# Altium PCB PCB1.PcbDoc
Units mil, origin at the board's own origin, x right, y up, seen from the top; angles counter-clockwise.
Board outline 3140 x 1400 mil, 2 copper layers (Top Layer, Bottom Layer); 21 components, 17 nets, 74 pads, 14 vias.
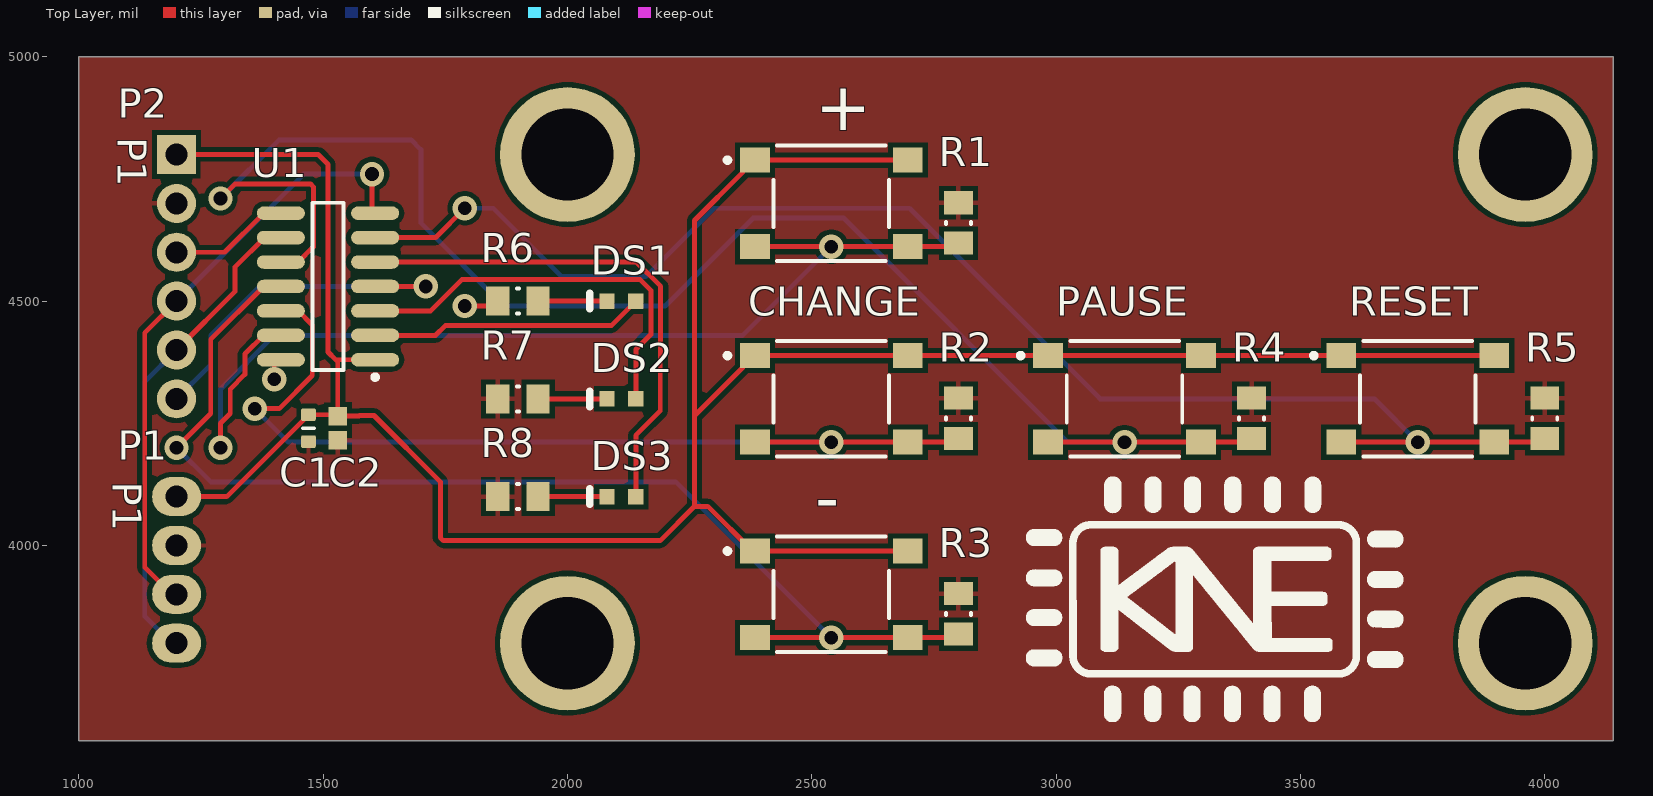
[diagram p0: Top Layer view]
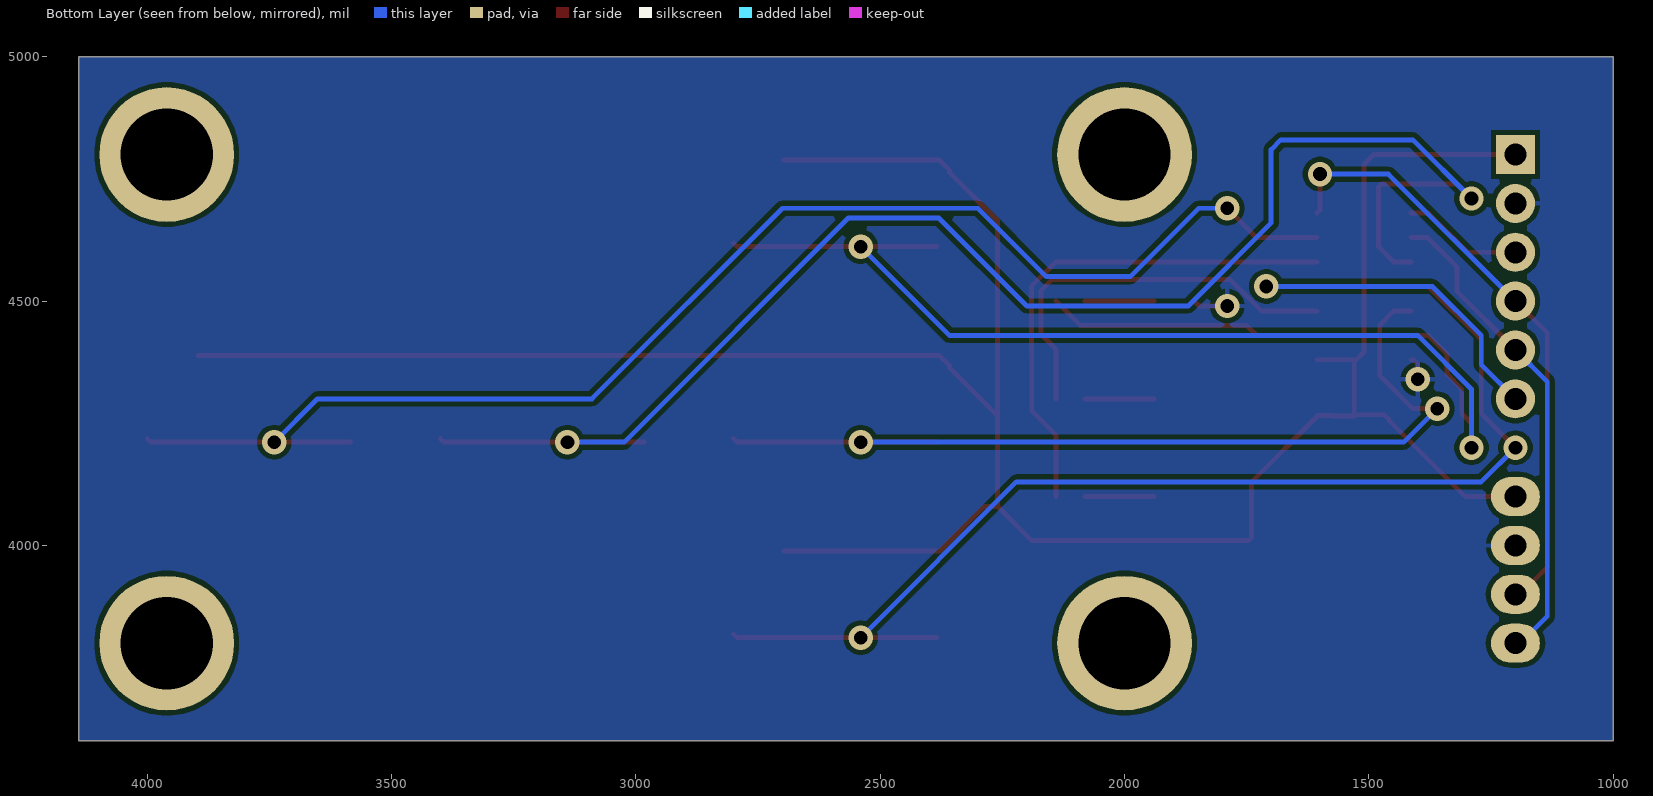
[diagram p1: Bottom Layer view, seen from below]
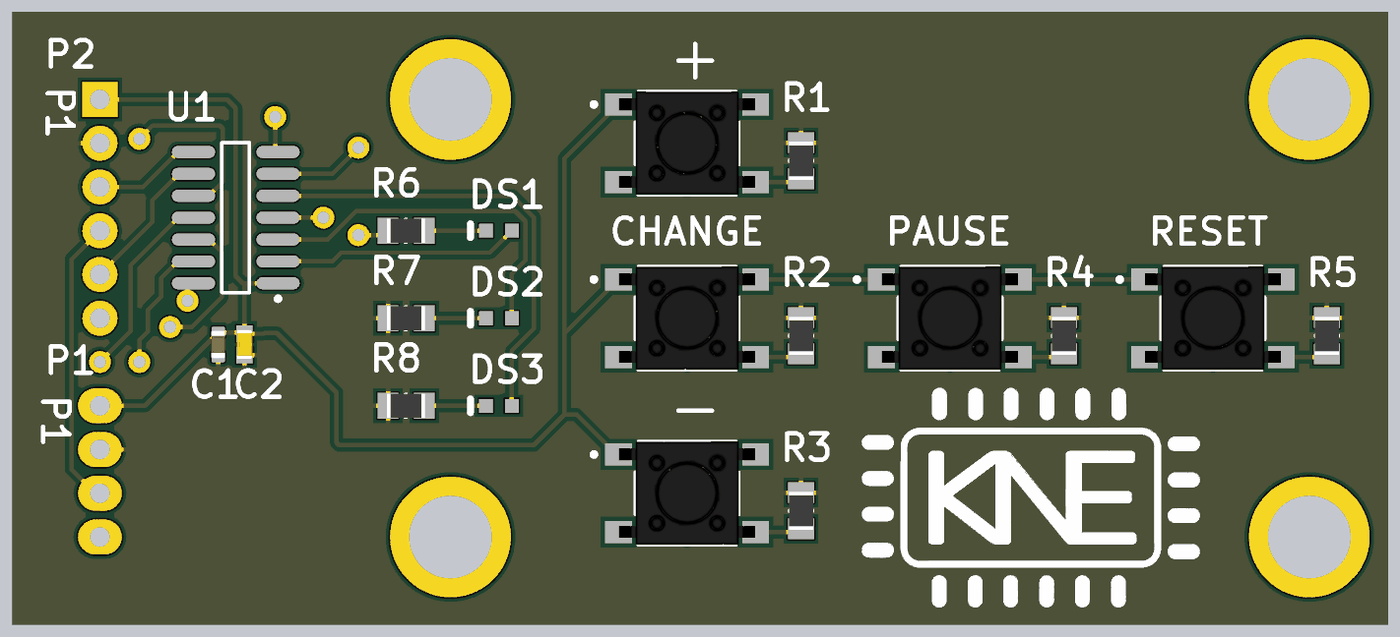
[diagram p2: 3D render of the assembled board from above, using the file's embedded part models]

## Layer stack, top to bottom
Top Solder: solder mask 0.4, Solder Resist, Dk 3.5
Top Layer: signal copper 1.4
Dielectric 1: dielectric 12.6, FR-4, Dk 4.8
Bottom Layer: signal copper 1.4
Bottom Solder: solder mask 0.4, Solder Resist, Dk 3.5

## Board outline
1000,3600 4140,3600 4140,5000 1000,5000

## Design rules (kind name [scope] priority, off if disabled: settings)
Clearance [All] p1: gap=10 ignorepadtopadclearanceinfootprint=FALSE
PolygonConnect [All] p1: connectstyle=Relief reliefconductorwidth=10 reliefentries=4 polygonreliefangle="90 Angle" airgapwidth=10
RoutingVias [All] p1: holewidth=28 width=50 viastyle="Through Hole" minholewidth=28 minwidth=50 maxholewidth=28 maxwidth=50
SolderMaskExpansion [All] p1: expansion=4 istentingtop=FALSE
SupplyNets "Schematic Supply Nets_1" [InNet('GND')] p1: voltage=0.000
SupplyNets "Schematic Supply Nets" [InNet('VCC')] p2: voltage=0.000
Width [All] p1: maxlimit=10 minlimit=10 preferedwidth=10
30 further rules are at their usual default settings.

## Components (designator, comment, footprint, x,y, rotation, side; value= is the part's Value field where it differs from the comment)
+ "PTS645SM43SMTR92LFS" FP-PTS645SM43SMTR92LFS-MFG 2540,4700 r0 top (schematic designator SW1)
- "PTS645SM43SMTR92LFS" FP-PTS645SM43SMTR92LFS-MFG 2540,3900 r0 top (schematic designator SW3)
C1 "Capacitor 10µF +/-20% 10V 0603" CAPC0603(1608)100_L 1470,4240 r270 top value=10µF
C2 "Capacitor 100 nF +/-10% 50 V 0603" CAPC1608X90X40NL10T20 1530,4240 r270 top value=100nF
CHANGE "PTS645SM43SMTR92LFS" FP-PTS645SM43SMTR92LFS-MFG 2540,4300 r0 top (schematic designator SW2)
DS1 "HSMH-C190" AVAG-HSMX-C190_V 2110.48,4500 r180 top
DS2 "HSMH-C190" AVAG-HSMX-C190_V 2110.48,4300 r180 top
DS3 "HSMH-C190" AVAG-HSMX-C190_V 2110.48,4100 r180 top
P1 "Goldpin 1x4/To main controller" "Goldpin 1x4-Footprint-1" 1200,4100 r270 top
P2 "Goldpin 1x6/UART for programming" "Goldpin 1x6-Footprint-1" 1200,4800 r270 top
PAUSE "PTS645SM43SMTR92LFS" FP-PTS645SM43SMTR92LFS-MFG 3140,4300 r0 top (schematic designator SW4)
R1 "Resistor 10k +/-1% 0805 125 mW" RESC2013X50X35ML15T15 2800,4660 r90 top value=10k
R2 "Resistor 10k +/-1% 0805 125 mW" RESC2013X50X35ML15T15 2800,4260 r90 top value=10k
R3 "Resistor 10k +/-1% 0805 125 mW" RESC2013X50X35ML15T15 2800,3860 r90 top value=10k
R4 "Resistor 10k +/-1% 0805 125 mW" RESC2013X50X35ML15T15 3400,4260 r90 top value=10k
R5 "Resistor 10k +/-1% 0805 125 mW" RESC2013X50X35ML15T15 4000,4260 r90 top value=10k
R6 "Resistor 10k +/-1% 0805 125 mW" RESC2013X50X35ML15T15 1898.66,4500 r180 top value=150
R7 "Resistor 10k +/-1% 0805 125 mW" RESC2013X50X35ML15T15 1898.66,4300 r180 top value=150
R8 "Resistor 10k +/-1% 0805 125 mW" RESC2013X50X35ML15T15 1898.66,4100 r180 top value=150
RESET "PTS645SM43SMTR92LFS" FP-PTS645SM43SMTR92LFS-MFG 3740,4300 r0 top (schematic designator SW5)
U1 "ATtiny84A-SSU" 14S1_M 1510,4530 r180 top

## Footprints (in the part's own frame and the unit in brackets; to place one, negate y for a bottom-side part, rotate by r counter-clockwise, add the part's x,y. Pads: shape width x height; smd on the part's side, far side on the other; paste and mask are expansions set on the pad)
14S1_M [mm] "SOIC, 14-Leads, Body 8.7x3.9mm, Pitch 1.27mm, IPC Low Density"
  oval 2.5x0.7 smd: 1(-2.45,3.81) 2(-2.45,2.54) 3(-2.45,1.27) 4(-2.45,0) 5(-2.45,-1.27) 6(-2.45,-2.54) 7(-2.45,-3.81) 8(2.45,-3.81) 9(2.45,-2.54) 10(2.45,-1.27) 11(2.45,0) 12(2.45,1.27) 13(2.45,2.54) 14(2.45,3.81)
  silkscreen extent -2.58,-4.35 0.8,4.83, body extent -1.99,-4.37 1.99,4.37, height 1.75
AVAG-HSMX-C190_V [mm] "SMD, 2-Leads, Body 1.6x0.8mm, Height 0.9mm"
  rect 0.8x0.8 smd: 1(-0.75,0) 2(0.75,0)
  silkscreen extent 1.65,-0.4 1.65,0.4, body extent -0.8,-0.4 0.8,0.4, height 0.9
CAPC0603(1608)100_L [mm] "Chip Capacitor, Body 1.6x0.8mm, Height 1.0mm, IPC High Density"
  rrect25% 0.66x0.76 smd: 1(-0.7,0) 2(0.7,0)
  silkscreen extent 0,-0.3 0,0.3, body extent -0.8,-0.4 0.8,0.4, height 0.95
CAPC1608X90X40NL10T20 [mm] "Chip Capacitor, 2-Leads, Body 1.70x0.90mm, IPC Medium Density"
  rect 0.95x0.95 smd: 1(-0.625,0) 2(0.625,0)
  body extent -0.85,-0.45 0.85,0.45, height 0.9
FP-PTS645SM43SMTR92LFS-MFG [mm]
  rect 1.55x1.3 smd paste+0 mask+0: 1(-3.975,2.25) 2(3.975,2.25) 3(-3.975,-2.25) 4(3.975,-2.25)
  silkscreen extent -5.52,-3 3,3, body extent -4.85,-3.1 4.85,3.1, height 0.25
"Goldpin 1x4-Footprint-1" [mil]
  oval 80x100 hole 45: 1(0,0) 2(100,0) 3(200,0) 4(300,0)
"Goldpin 1x6-Footprint-1" [mil]
  rect 80x80 hole 45: 1(0,0)
  round 80 hole 45: 2(100,0) 3(200,0) 4(300,0) 5(400,0) 6(500,0)
RESC2013X50X35ML15T15 [mm] "Chip Resistor, 2-Leads, Body 2.2x1.4mm, IPC Low Density"
  rect 1.2x1.5 smd: 1(-1.05,0) 2(1.05,0)
  silkscreen extent -0.05,-0.65 0.05,0.65, body extent -1.1,-0.7 1.1,0.7, height 0.5

## Part data
+ - CHANGE PAUSE RESET: library part CMP-2000-05160-2, "SWITCH TACTILE SPST-NO 0.05A 12V", Case/Package=SMD/SMT, Color=Black, Contact Resistance=100mR, Current Rating=50mA, Max Operating Temperature=60°C, Max Voltage Rating (DC)=12V, Min Operating Temperature=-20°C, Operating Force=160gf, Package Quantity=1, Actuator Length=0.85mm, Actuator Material=Nylon, Actuator Type=Standard, Contact Material=Silver, Contact Plating=Silver, Depth=9mm, Illumination Type=Non-Illuminated, Lead Free="Lead Free", Length=6mm, Max Current Rating=50mA, Mechanical Life=100000Cycles, Mount="Surface Mount", Orientation=Straight, Packaging="Tape and Reel", REACH SVHC="No SVHC", Switch Function=Off-Mom, Termination="Gull Wing", Throw Configuration=SPST, Voltage Rating (DC)=12V
C1: library part CMP-001-00075-4, "Chip Capacitor, 10µF +/-20%, 10V, 0603, Thickness 1 mm", Case/Package=0603, Max Operating Temperature=85°C, Min Operating Temperature=-55°C, Tolerance=10%, Voltage Rating=10V, Mounting Technology=SMT, Pins=2
C2: library part CMP-001-00017-6, "Chip Capacitor, 100 nF, +/- 10%, 50 V, 0603 (1608 Metric)", Capacitor Type=Ceramic, Case/Package=0603, Max Operating Temperature=125°C, Min Operating Temperature=-55°C, Tolerance=10%, Voltage Rating=50V, Mounting Technology=SM, Pins=2, RoHS Compliant=True
DS1 DS2 DS3: library part CMP-007-00014-2, "LED Uni-Color Red, 65 mW, 20 mA, -40 to 85 degC, 2-Pin SMD, RoHS, Tape and Reel", Case/Package=0603, Colour=Red, Forward Current=20mA, Forward Voltage=1.8V, Manufacturer=Avago, Max Operating Temperature=85°C, Min Operating Temperature=-40°C, Package Description="2-Pin Surface Mount Device, Body 1.6 x 0.8 mm, Height 0.9 mm", Package Quantity=4000, Package Reference=HSMX-C190, Power=78mW, Datasheet URL=http://docs.avagotech.com/docs/AV02-0551EN, Datasheet Version=Mar-12, Illumination Colour=Red, Lens Style=Diffused, Luminous Intensity=17mcd, Manufacturer URL=http://www.avagotech.com/, Mounting Technology=SM, Nominal Vf=1.8V, Packaging=TapeandReel, Pins=2, RoHS Compliant=True, Viewing Angle=170degrees
P1: library part CMP-002-00078-2, "Goldpin, connector, 1 row 4 pin"
P2: library part CMP-002-00081-1, "Goldpin, connector, 1 row 6 pin"
R1 R2 R3 R4 R5 R6 R7 R8: library part CMP-009-00018-5, "Chip Resistor, 10 KOhm, +/- 1%, 125 mW, -55 to 155 degC, 0805 (2012 Metric)", Case/Package=0805, Max Operating Temperature=155°C, Min Operating Temperature=-55°C, Power=125mW, Tolerance=1%, Voltage Rating=150V, Mounting Technology=SM, Pins=2, RoHS Compliant=True
U1: library part CMP-0093-00274-1, "8-bit AVR Microcontroller,  20MHz, 1.8-5.5V, 8KB Flash, 512 Bytes EEPROM, 512 Bytes SRAM, 14-pin SOIC, Industrial Grade (-40°C to 85°C), Pb-Free", Code_IPC=SOIC127P600-14, Code_JEDEC=MS-012-AB, ComponentLink1Description="Manufacturer URL", ComponentLink1URL=http://www.atmel.com/, ComponentLink2Description="ATtiny24A/44A/84A Datasheet", ComponentLink2URL=http://www.atmel.com/dyn/resources/prod_documents/doc8183.pdf, ComponentLink3Description="ATtiny24A/44A/84A Summary", ComponentLink3URL=http://www.atmel.com/dyn/resources/prod_documents/8183S.pdf, DatasheetVersion="revD, Apr-2011", PackageDescription="14-Lead, 0.150â€ Wide Body, Plastic Gull Wing Small Outline Package (SOIC)", PackageReference=14S1, PackageVersion="revA, Feb-2002"

## Free pads (board coordinates)
  round 275.59 hole 188.98: M1(2000,4800) M2(3960,4800) M3(2000,3800) M4(3960,3800)

## Via types
v1: diameter 50, hole 28, Top Layer to Bottom Layer, 14 vias

## Nets (pads, with @x,y where several pads share a name; then routed paths per layer and width w, separated by ;. In a path a pad name is that pad's centre, name@x,y a point inside that pad or via, vN(x,y) a via of type N, cw(c..) or ccw(c..) an arc to the next point about the centre after c; other vN are vias at no path point)
GND: C1.2 C2.2 P1.2 P2.2 R1.2 R2.2 R3.2 R4.2 R5.2 R6.2 R7.2 R8.2 U1.14 | length 120.3
  Top Layer w10: v1(1400,4340) 1400,4371.89 1408.11,4380 U1.14 ; v1(1790,4490) 1847.32,4490 R6.2
MISO: P2.3 U1.8 | length 246.7
  Top Layer w10: P2.3 1298.11,4600 1378.11,4680 U1.8
NetDS1_2: DS1.2 R6.1 | length 140.9
  Top Layer w10: R6.1 DS1.2
NetDS2_2: DS2.2 R7.1 | length 140.9
  Top Layer w10: R7.1 DS2.2
NetDS3_2: DS3.2 R8.1 | length 140.9
  Top Layer w10: R8.1 DS3.2
PA0: +.3 +.4 R1.1 U1.13 | length 2212.1
  Top Layer w10: v1(1290,4200) 1290,4250 1310,4270 1310,4320 1340,4350 1340,4391.89 1378.11,4430 U1.13 ; +.3 v1(2540,4611.42) +.4 2792.76,4611.42 R1.1
  Bottom Layer w10: v1(1290,4200) 1290,4320 1400,4430 2358.58,4430 v1(2540,4611.42)
PA1: CHANGE.3 CHANGE.4 R2.1 U1.12 | length 1953.3
  Top Layer w10: v1(1360,4280) 1410,4280 1477.76,4347.76 1477.76,4451.22 1448.98,4480 U1.12 ; CHANGE.3 v1(2540,4211.42) CHANGE.4 2792.76,4211.42 R2.1
  Bottom Layer w10: v1(1360,4280) 1428.58,4211.42 v1(2540,4211.42)
PA2: -.3 -.4 R3.1 U1.11 | length 2359.7
  Top Layer w10: v1(1200,4200) 1270,4270 1270,4421.89 1378.11,4530 U1.11 ; -.3 v1(2540,3811.42) -.4 2792.76,3811.42 R3.1
  Bottom Layer w10: v1(1200,4200) 1270,4130 2221.42,4130 v1(2540,3811.42)
PA3: PAUSE.3 PAUSE.4 R4.1 U1.10 | length 3219.7
  Top Layer w10: v1(1290,4710) 1320,4740 1474.14,4740 1480,4734.14 1480,4611.02 1448.98,4580 U1.10 ; PAUSE.3 v1(3140,4211.42) PAUSE.4 3392.76,4211.42 R4.1
  Bottom Layer w10: v1(1290,4710) 1410,4830 1680,4830 1700,4810 1700,4660 1870,4490 2200,4490 2380,4670 2565.3,4670 3023.88,4211.42 v1(3140,4211.42)
PA4: R5.1 RESET.3 RESET.4 U1.6 | length 2892.1
  Top Layer w10: U1.6 1730,4630 v1(1790,4690) ; RESET.3 v1(3740,4211.42) RESET.4 3992.76,4211.42 R5.1
  Bottom Layer w10: v1(1790,4690) 1848.28,4690 1988.28,4550 2160,4550 2300,4690 2700,4690 3090,4300 3651.42,4300 v1(3740,4211.42)
PB0: DS1.1 U1.2 | length 562.5
  Top Layer w10: U1.2 1730,4430 1750,4450 2090,4450 DS1.1
PB1: DS2.1 U1.3 | length 835.1
  Top Layer w10: U1.3 1720,4480 1784.53,4544.53 2148.18,4544.53 2170.75,4521.96 2170.75,4431.73 2140,4400.98 DS2.1
PB2: DS3.1 U1.5 | length 1056.2
  Top Layer w10: U1.5 2140.99,4580 2190.75,4530.25 2190.75,4390.75 2190,4390 2190,4275.37 2140,4225.37 DS3.1
RESET: P2.6 U1.4 | length 783.1
  Top Layer w10: P2.6 P2.6@1210,4300 ; U1.4 v1(1710,4530)
  Bottom Layer w10: P2.6@1205.15,4326.97 1202.93,4324.75 1200,4321.82 P2.6 1270,4370 1270,4430 1370,4530 v1(1710,4530)
SCL/CLK: P1.4 P2.5 U1.9 | length 997.8
  Top Layer w10: P2.5 1320,4520 1320,4570 1380,4630 U1.9
  Bottom Layer w10: P1.4 1190,3800 1135,3855 1135,4335 P2.5
SDA/MOSI: P1.3 P2.4 U1.7 | length 1250.1
  Top Layer w10: P1.3 1190,3900 1135,3955 1135,4435 P2.4 ; v1(1600,4760) 1600,4686.46 U1.7
  Bottom Layer w10: P2.4 1460,4760 v1(1600,4760)
VCC: +.1 +.2 -.1 -.2 C1.1 C2.1 CHANGE.1 CHANGE.2 P1.1 P2.1 PAUSE.1 PAUSE.2 RESET.1 RESET.2 U1.1 | length 5497.2
  Top Layer w10: P1.1 1302.44,4100 1460.04,4257.6 1460.04,4259.56 1468.04,4267.56 C1.1 1527.05,4267.56 C2.1 ; P2.1 1490,4800 1510,4780 1510,4395.86 1525.86,4380 ; U1.1 1525.86,4380 ; -.2 -.1 2378.58,3988.58 2287.17,4080 2260,4080 ; +.2 +.1 2378.58,4788.58 2357.99,4767.99 2357.99,4763.07 2260,4665.08 2260,4265.08 ; RESET.2 RESET.1 PAUSE.2 PAUSE.1 CHANGE.2 CHANGE.1 2378.58,4388.58 2357.99,4367.99 2357.99,4363.07 2260,4265.08 ; 1525.86,4380 1530,4375.86 C2.1 ; C2.1 1573.3,4264.61 1574.55,4265.86 1604.14,4265.86 1740,4130 1740,4015.86 1745.86,4010 2190,4010 2260,4080 ; 2260,4080 2260,4265.08

## Polygon pours and split planes (outlines as drawn)
GND on Top Layer "GROUND POUR" (solid, pour order 0): 1000,5000 1010,5000 4140,5000 4140,3600 1000,3600
GND on Bottom Layer "BOTTOM GROUND" (solid, pour order 1): 1000,5000 1005,5000 4140,5000 4140,3600 1000,3600

## Silkscreen, mask and mechanical layers (free items; w line width, h text height)
Top Overlay:
  drawing of 22 lines, arcs and shapes, not listed

## Text inside footprints (layer, text, board x,y; h text height)
P2: Top Overlay "P1" at 1080,4835 h60 r270